# EAGLE board FX I2C Proto Shield v9 (EAGLE 6.4)
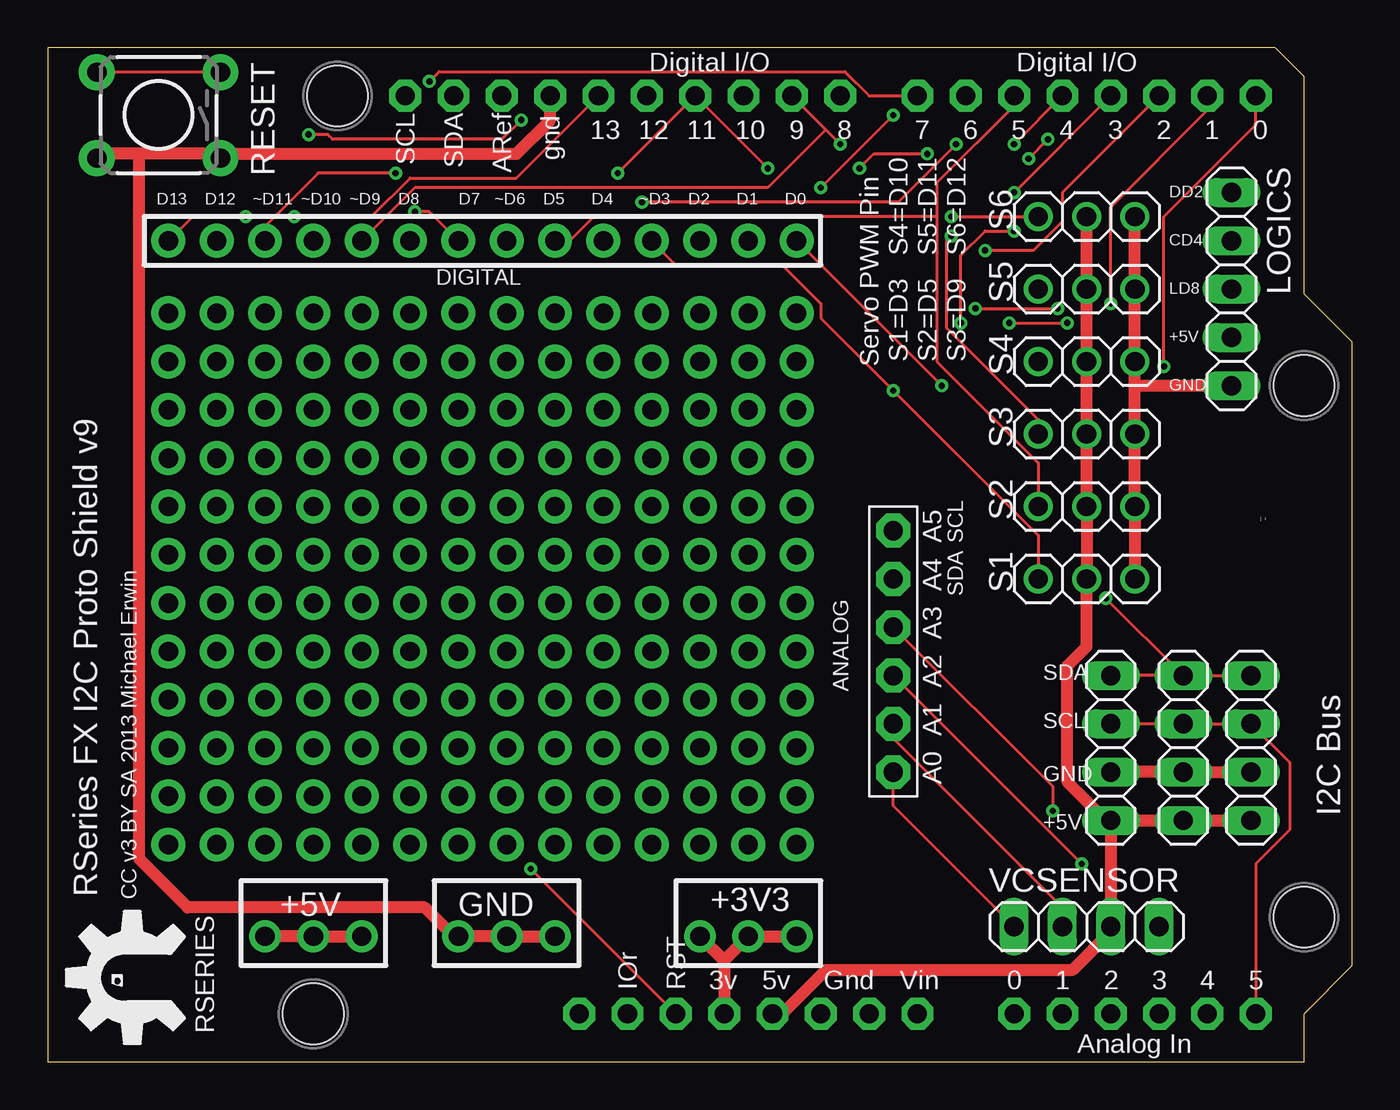
[diagram p0: board, top side]
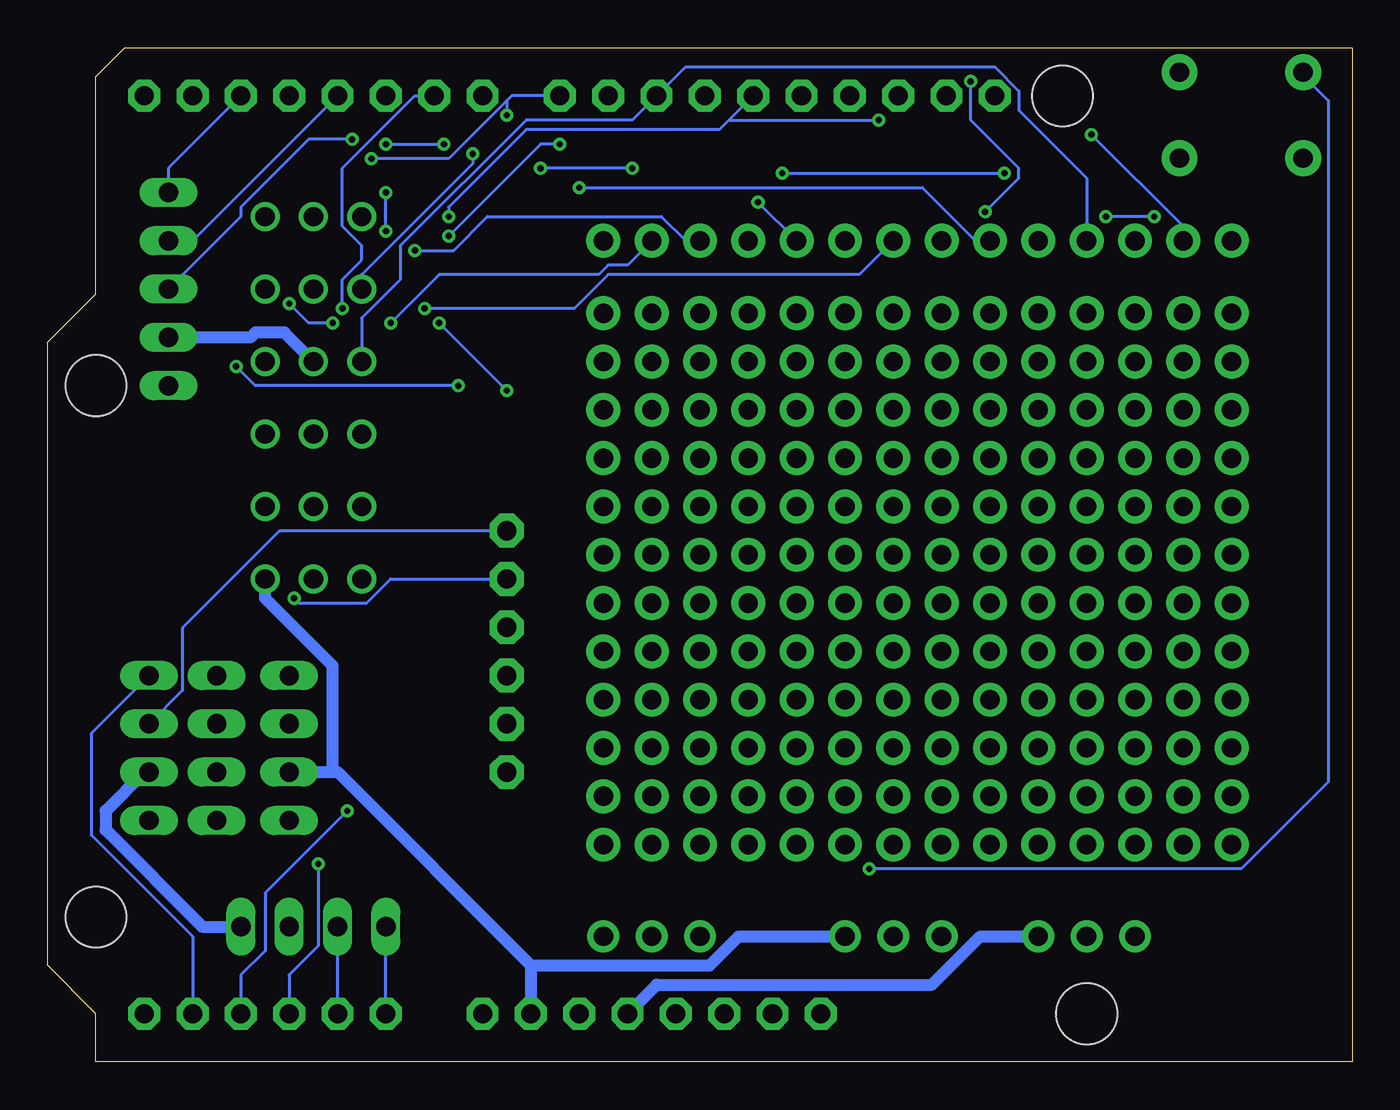
[diagram p1: board, bottom side, seen from below]

Size 68.58 x 53.34 mm. Coordinates in mm from the lower left corner, seen from the top.
Copper layers (1*16): Top 0.0356mm / dielectric 1.5011mm / Bottom 0.0356mm
Design rules "default": minimum track width 6mil, minimum drill 13mil, track to track 6mil, track to pad 6mil, pad to pad 6mil, via to via 6mil, smd to smd 6mil, copper to edge 15mil, drill to drill 6mil, minimum pad ring 7mil, minimum via ring 7mil, stop-mask expansion 4mil, vias tented up to drill 0mil, thermal gap 10mil
Net classes: 1 POWER: width 0.635 mm, clearance 0.254 mm
Holes 3.2 mm at 15.24,50.8 66.04,35.56 66.04,7.62 13.97,2.54

## Footprints (pad centres in the part's own frame; a part is rotated, then mirrored left to right if it is on the bottom)
1X03-CLEANBIG = drill 1.016 pad 1.676: 1 -2.54,0; 2 0,0; 3 2.54,0
1X06-BIG = drill 1.016 pad 1.778 octagon: 1 -6.35,0; 2 -3.81,0; 3 -1.27,0; 4 1.27,0; 5 3.81,0; 6 6.35,0
1X14-CB = drill 1.016 pad 1.778: 1 -16.51,0; 2 -13.97,0; 3 -11.43,0; 4 -8.89,0; 5 -6.35,0; 6 -3.81,0; 7 -1.27,0; 8 1.27,0; 9 3.81,0; 10 6.35,0; 11 8.89,0; 12 11.43,0; 13 13.97,0; 14 16.51,0
1X04 = drill 1.016 long: 1 -3.81,0; 2 -1.27,0; 3 1.27,0; 4 3.81,0
1X12-CB = drill 1.016 pad 1.778: 1 -13.97,0; 2 -11.43,0; 3 -8.89,0; 4 -6.35,0; 5 -3.81,0; 6 -1.27,0; 7 1.27,0; 8 3.81,0; 9 6.35,0; 10 8.89,0; 11 11.43,0; 12 13.97,0
1X05 = drill 1.016 long: 1 -5.08,0; 2 -2.54,0; 3 0,0; 4 2.54,0; 5 5.08,0
TACTILE-PTH = drill 1.016 pad 1.88: 1 -3.251,2.261; 2 3.251,2.261; 3 -3.251,-2.261; 4 3.251,-2.261
1X03 = drill 1.016: 1 -2.54,0; 2 0,0; 3 2.54,0
ARDUINOR3 = drill 1 pad 1.676 octagon: 3V 35.56,2.54; 5V 38.1,2.54; A0 50.8,2.54; A1 53.34,2.54; A2 55.88,2.54; A3 58.42,2.54; A4 60.96,2.54; A5 63.5,2.54; AREF 23.876,50.8; D0 63.5,50.8; D1 60.96,50.8; D2 58.42,50.8; D3 55.88,50.8; D4 53.34,50.8; D5 50.8,50.8; D6 48.26,50.8; D7 45.72,50.8; D8 41.656,50.8; D9 39.116,50.8; D10 36.576,50.8; D11 34.036,50.8; D12 31.496,50.8; D13 28.956,50.8; GND 26.416,50.8; GND1 43.18,2.54; GND2 40.64,2.54; IOREF 30.48,2.54; RESERVED 27.94,2.54; RESET 33.02,2.54; SCL 18.796,50.8; SDA 21.336,50.8; VIN 45.72,2.54

## Placement (x,y rotation side)
+3V3  [1X03-CLEANBIG]  36.83,6.6 0 top
+5V  [1X03-CLEANBIG]  13.97,6.6 0 top
ANALOG  [1X06-BIG]  44.45,21.59 90 top
DIGITAL  [1X14-CB]  22.86,43.18 180 top
GND  [1X03-CLEANBIG]  24.13,6.6 0 top
I2C3  [1X04]  63.25,16.51 270 top
JP1  [1X04]  55.88,16.51 270 top
JP2  [1X04]  59.69,16.51 270 top
JP3  [1X12-CB]  20.32,11.43 0 top
JP4  [1X12-CB]  20.32,13.97 0 top
JP5  [1X12-CB]  20.32,16.51 0 top
JP6  [1X12-CB]  20.32,19.05 0 top
JP7  [1X12-CB]  20.32,21.59 0 top
JP8  [1X12-CB]  20.32,24.13 0 top
JP9  [1X12-CB]  20.32,26.67 0 top
JP10  [1X12-CB]  20.32,29.21 0 top
JP11  [1X12-CB]  20.32,31.75 0 top
JP12  [1X12-CB]  20.32,34.29 0 top
JP13  [1X12-CB]  20.32,36.83 0 top
JP14  [1X12-CB]  20.32,39.37 0 top
JP17  [1X12-CB]  36.83,25.4 90 top
JP18  [1X12-CB]  39.37,25.4 90 top
LOGICS  [1X05]  62.23,40.64 270 top
RESET  [TACTILE-PTH]  5.84,49.78 180 top
S1  [1X03]  54.61,25.4 0 top
S2  [1X03]  54.61,29.21 0 top
S3  [1X03]  54.61,33.02 0 top
S4  [1X03]  54.61,36.83 0 top
S5  [1X03]  54.61,40.64 0 top
S6  [1X03]  54.61,44.45 0 top
U1  ARDUINOR3-DIMENSION  [ARDUINOR3]  0,0 0 top
U$1  [RSERIES-OSHW-LOGO-LARGE]  4.45,4.45 90 top
VCSENSOR  [1X04]  54.61,7.11 0 top

## Library data of the parts
+3V3 +5V ANALOG DIGITAL GND JP3-JP14 JP17 JP18 S1-S6 U1 = adafruit
I2C3 JP1 JP2 LOGICS VCSENSOR = pinhead
RESET = SparkFun-Electromechanical
U$1 = rseries

## Nets
+3V3 [POWER]: +3V3.1 +3V3.2 +3V3.3 U1.3V
+5V [POWER]: +5V.1 +5V.2 +5V.3 I2C3.4 JP1.4 JP2.4 LOGICS.4 S1.2 S2.2 S3.2 S4.2 S5.2 S6.2 U1.5V VCSENSOR.3
GND [POWER]: GND.1 GND.2 GND.3 I2C3.3 JP1.3 JP2.3 LOGICS.5 RESET.1 RESET.2 S1.3 S2.3 S3.3 S4.3 S5.3 S6.3 U1.GND U1.GND1 VCSENSOR.4
GND2: U1.GND2
N$1: ANALOG.1 U1.A0 VCSENSOR.1
N$2: DIGITAL.9 LOGICS.3 U1.D8
N$3: ANALOG.2 U1.A1 VCSENSOR.2
N$4: DIGITAL.4 S1.1 U1.D3
N$5: DIGITAL.6 S2.1 U1.D5
N$6: DIGITAL.10 S3.1 U1.D9
N$7: DIGITAL.11 S4.1 U1.D10
N$8: DIGITAL.12 S5.1 U1.D11
N$9: DIGITAL.13 S6.1 U1.D12
N$10: DIGITAL.5 LOGICS.2 U1.D4
N$11: DIGITAL.3 LOGICS.1 U1.D2
N$12: RESET.3 RESET.4 U1.RESET
N$14: ANALOG.3 U1.A2
N$15: ANALOG.6 I2C3.2 JP1.2 JP2.2 U1.A5
N$16: ANALOG.5 I2C3.1 JP1.1 JP2.1 U1.A4
N$17: ANALOG.4 U1.A3
N$18: DIGITAL.1 U1.D0
N$19: DIGITAL.2 U1.D1
N$21: DIGITAL.7 U1.D6
N$22: DIGITAL.8 U1.D7
N$28: DIGITAL.14 U1.D13
VIN: U1.VIN

## Tracks (layer width: path | path; a pad name or v marks a point on that pad's centre or on a via)
+3V3
  Top 0.635: 35.56,5.33 U1.3V | +3V3.1 35.56,5.33 | 35.56,5.33 +3V3.2 +3V3.3
+5V
  Top 0.635: S6.2 S5.2 S4.2 S3.2 S2.2 S1.2 54.61,21.84 53.59,20.83 53.59,14.73 55.63,12.7 JP1.4 | +5V.1 +5V.2 +5V.3 | JP1.4 VCSENSOR.3 55.88,6.86 53.85,4.83 40.89,4.83 38.61,2.54 U1.5V | JP1.4 JP2.4 I2C3.4
  Bottom 0.635: LOGICS.4 57.91,38.1 57.66,38.35 56.13,38.35 S4.2 | +5V.3 19.56,6.6 22.1,4.06 36.58,4.06 U1.5V
GND
  Top 0.635: U1.GND 26.42,49.53 24.64,47.75 9.14,47.75 RESET.1 8.89,47.75 4.83,47.75 | 4.83,47.75 2.79,47.75 RESET.2 | S1.3 S2.3 S3.3 57.15,35.56 | 57.15,35.56 S4.3 S5.3 S6.3 | 57.15,35.56 LOGICS.5 | GND.3 GND.2 GND.1 21.34,6.6 19.81,8.13 7.37,8.13 4.83,10.67 4.83,47.75 | JP1.3 JP2.3 I2C3.3
  Bottom 0.635: VCSENSOR.4 60.45,7.11 65.53,12.19 65.53,13.21 63.5,15.24 I2C3.3 | 43.18,5.08 U1.GND1 | 43.18,5.08 53.34,15.24 53.59,15.24 | JP1.3 53.59,15.24 | GND.3 32.26,6.6 33.78,5.08 43.18,5.08 | S1.3 57.15,24.38 53.59,20.83 53.59,15.24
N$1
  Top 0.152: ANALOG.1 44.45,13.46 VCSENSOR.1
  Bottom 0.152: U1.A0 VCSENSOR.1
N$2  (via drill 0.33)
  Top 0.152: v51.56,47.5 v52.58,48.51 | v44.45,49.78 v40.64,45.97
  Bottom 0.152: LOGICS.3 58.42,44.45 58.42,44.96 54.86,48.51 v52.58,48.51 | v51.56,47.5 47.5,47.5 44.45,50.55 | 44.45,50.55 44.2,50.8 U1.D8 | DIGITAL.9 19.81,43.18 22.61,45.97 v40.64,45.97 | 44.45,50.55 v44.45,49.78
N$3
  Top 0.152: ANALOG.2 44.45,17.02 53.34,8.13 VCSENSOR.2
  Bottom 0.152: U1.A1 VCSENSOR.2
N$4  (via drill 0.33)
  Top 0.152: S1.1 52.07,27.69 v44.45,35.31 40.64,39.12 40.64,39.88 38.61,41.91 33.02,41.91 DIGITAL.4 | v50.8,45.72 U1.D3 | v50.8,43.69 49.28,43.69 48.01,42.42 v48.01,38.86
  Bottom 0.152: v50.8,43.69 v50.8,45.72 | v44.45,35.31 v48.01,38.86
N$5
  Top 0.152: S2.1 52.07,31.5 46.74,36.83 46.74,44.45 | 46.74,44.45 46.74,46.23 50.8,50.29 U1.D5 | DIGITAL.6 27.43,43.18 28.7,44.45 46.74,44.45
N$6  (via drill 0.33)
  Top 0.152: S3.1 52.07,33.78 47.24,38.61 47.24,43.18 v47.5,43.43 | U1.D9 40.89,49.02 | 40.89,49.02 v41.66,48.26 | DIGITAL.10 19.3,45.97 37.85,45.97 40.89,49.02
  Bottom 0.152: v47.5,43.43 42.67,48.26 v41.66,48.26
N$7
  Bottom 0.152: S4.1 52.07,39.12 50.04,41.15 50.04,42.93 43.43,49.53 37.85,49.53 U1.D10 35.05,52.32 18.8,52.32 17.53,51.05 17.53,50.04 13.97,46.48 DIGITAL.11
N$8  (via drill 0.33)
  Top 0.152: v46.23,47.75 43.43,47.75 v42.67,46.99 | v37.85,46.99 U1.D11 v29.97,46.74 | DIGITAL.12 11.43,43.94 14.22,46.74 v18.29,46.74
  Bottom 0.152: S5.1 52.07,41.4 46.23,47.24 v46.23,47.75 | v37.85,46.99 v42.67,46.99 | v29.97,46.74 v18.29,46.74
N$9  (via drill 0.33)
  Top 0.152: v47.5,44.45 S6.1 | v13.72,48.77 14.73,48.77 14.99,48.51 23.88,48.51 v24.89,49.53
  Bottom 0.152: v47.5,44.45 47.5,44.96 43.43,49.02 33.27,49.02 32.77,49.53 | U1.D12 32.77,49.53 | DIGITAL.13 8.89,43.94 v13.72,48.77 | 32.77,49.53 v24.89,49.53
N$10  (via drill 0.33)
  Top 0.152: v31.24,45.21 44.7,45.21 v47.75,48.26 | U1.D4 v50.8,48.26
  Bottom 0.152: LOGICS.2 60.96,43.18 U1.D4 | v31.24,45.21 DIGITAL.5 | v50.8,48.26 v47.75,48.26
N$11  (via drill 0.33)
  Top 0.152: v49.28,42.67 51.82,42.67 53.34,44.2 53.34,45.72 U1.D2
  Bottom 0.152: LOGICS.1 62.23,46.99 U1.D2 | DIGITAL.3 35.05,43.18 36.32,44.45 45.47,44.45 47.24,42.67 v49.28,42.67
N$12  (via drill 0.33)
  Top 0.152: v25.4,10.16 U1.RESET | RESET.3 8.89,52.07 2.79,52.07 RESET.4
  Bottom 0.152: v25.4,10.16 5.84,10.16 1.27,14.73 1.27,50.55 2.54,51.82 RESET.4
N$14  (via drill 0.33)
  Top 0.152: ANALOG.3 v54.36,10.41
  Bottom 0.152: U1.A2 55.88,4.57 54.36,6.1 v54.36,10.41
N$15
  Top 0.152: JP1.2 JP2.2 I2C3.2 65.28,15.75 65.28,12.19 63.5,10.41 U1.A5
  Bottom 0.152: ANALOG.6 56.39,27.94 61.47,22.86 61.47,19.56 I2C3.2
N$16  (via drill 0.33)
  Top 0.152: JP2.1 JP1.1 | JP2.1 I2C3.1 | JP2.1 v55.63,24.38
  Bottom 0.152: U1.A4 60.96,6.6 66.29,11.94 66.29,17.27 I2C3.1 | ANALOG.5 50.55,25.4 51.82,24.13 55.37,24.13 v55.63,24.38
N$17  (via drill 0.33)
  Top 0.152: v52.83,13.21 52.83,14.48 ANALOG.4
  Bottom 0.152: U1.A3 58.42,4.57 57.15,5.84 57.15,8.89 v52.83,13.21
N$18  (via drill 0.33)
  Top 0.152: U1.D0 63.5,49.28 58.67,44.45 v58.67,36.58 | DIGITAL.1 v46.99,35.56
  Bottom 0.152: v58.67,36.58 57.66,35.56 v46.99,35.56
N$19  (via drill 0.33)
  Top 0.152: U1.D1 60.96,50.04 55.88,44.96 v55.88,39.88 | v50.55,38.86 v53.59,38.86
  Bottom 0.152: v55.88,39.88 54.86,38.86 v53.59,38.86 | v50.55,38.86 48.01,41.4 39.62,41.4 39.12,41.91 38.1,41.91 DIGITAL.2
N$21  (via drill 0.33)
  Top 0.152: v48.77,39.62 v53.09,39.62
  Bottom 0.152: U1.D6 49.28,50.8 53.09,46.99 53.09,43.94 52.07,42.93 52.07,42.16 53.09,41.15 v53.09,39.62 | v48.77,39.62 40.89,39.62 39.12,41.4 25.91,41.4 DIGITAL.7
N$22  (via drill 0.33)
  Top 0.152: U1.D7 43.18,50.8 41.91,52.07 20.57,52.07 v20.07,51.56 | v19.3,44.7 20.07,44.7 DIGITAL.8
  Bottom 0.152: v20.07,51.56 20.07,49.53 17.53,46.99 17.53,46.48 v19.3,44.7
N$28  (via drill 0.33)
  Top 0.152: U1.D13 24.64,46.48 19.05,46.48 17.02,44.45 v12.95,44.45 | v10.41,44.45 7.62,44.45 DIGITAL.14
  Bottom 0.152: v10.41,44.45 v12.95,44.45

## Text on the board
_tsilk: D13 | D12 | ~D11 | ~D10 | ~D9 | D8 | D7 | ~D6 | D5 | D4 | ~D3 | D2 | D1 | D0 | DD2 | CD4 | DIGITAL | S4=D10 | S5=D11 | S6=D12 | LD8 | +5V | Servo PWM Pin | S1=D3 | S2=D5 | S3=D9 | GND | A5 | SCL | A4 | SDA | A3 | A2 | SDA | SCL | A1 | A0 | GND | I2C Bus | +5V | RSeries FX I2C Proto Shield v9 | CC v3 BY SA 2013 Michael Erwin | RSERIES
200bmp: SDA